# Altium PCB SimpleNode1.PcbDoc
Units mm, origin at the board's own origin, x right, y up, seen from the top; angles counter-clockwise.
Board outline 152.4 x 101.6 mm, 2 copper layers (Top Layer, Bottom Layer); 36 components, 31 nets, 118 pads, 0 vias.
Unrouted connection lines stored in the file: 73.
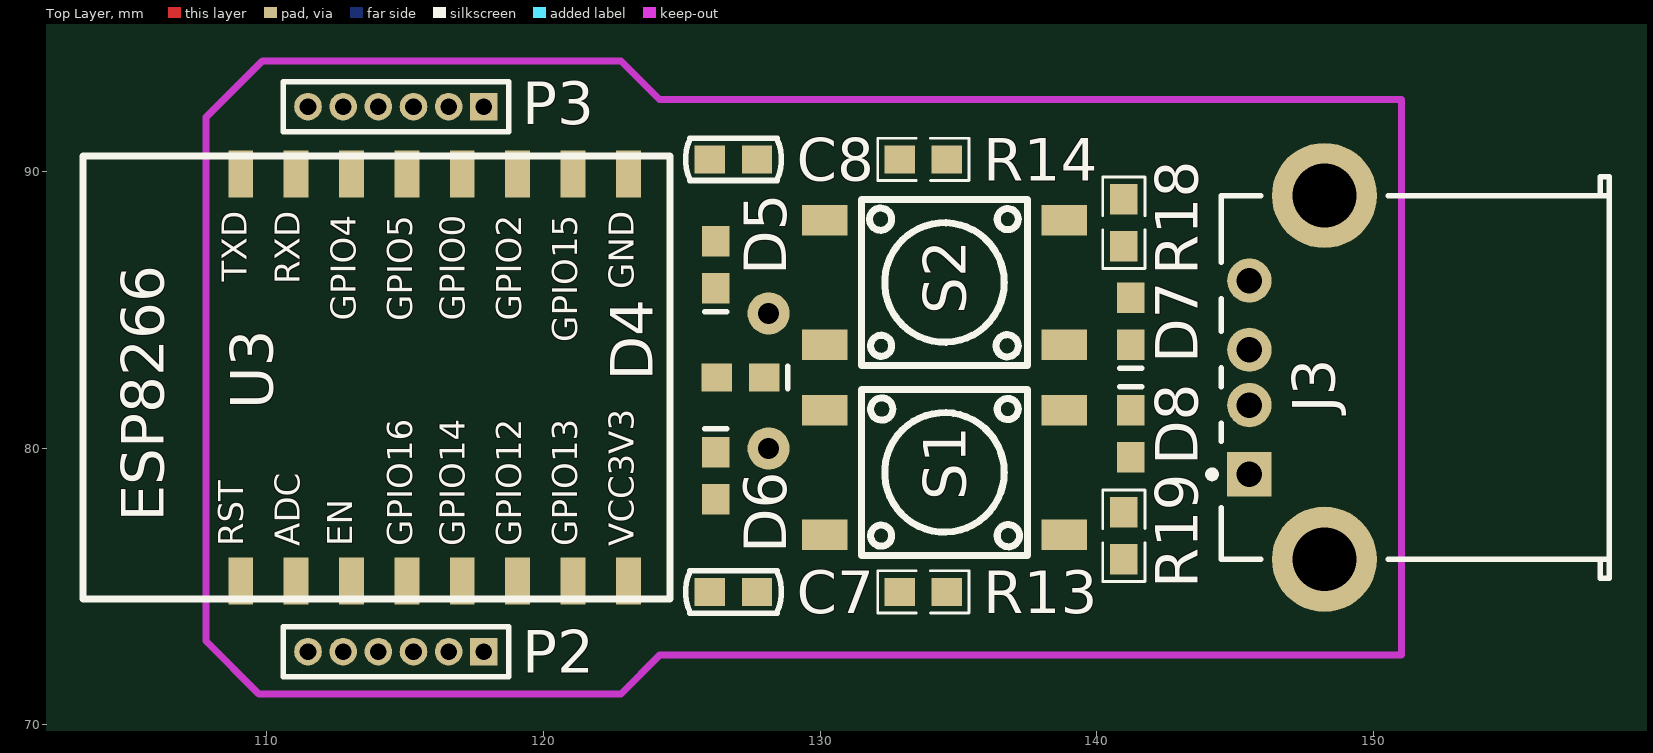
[diagram p0: Top Layer view]
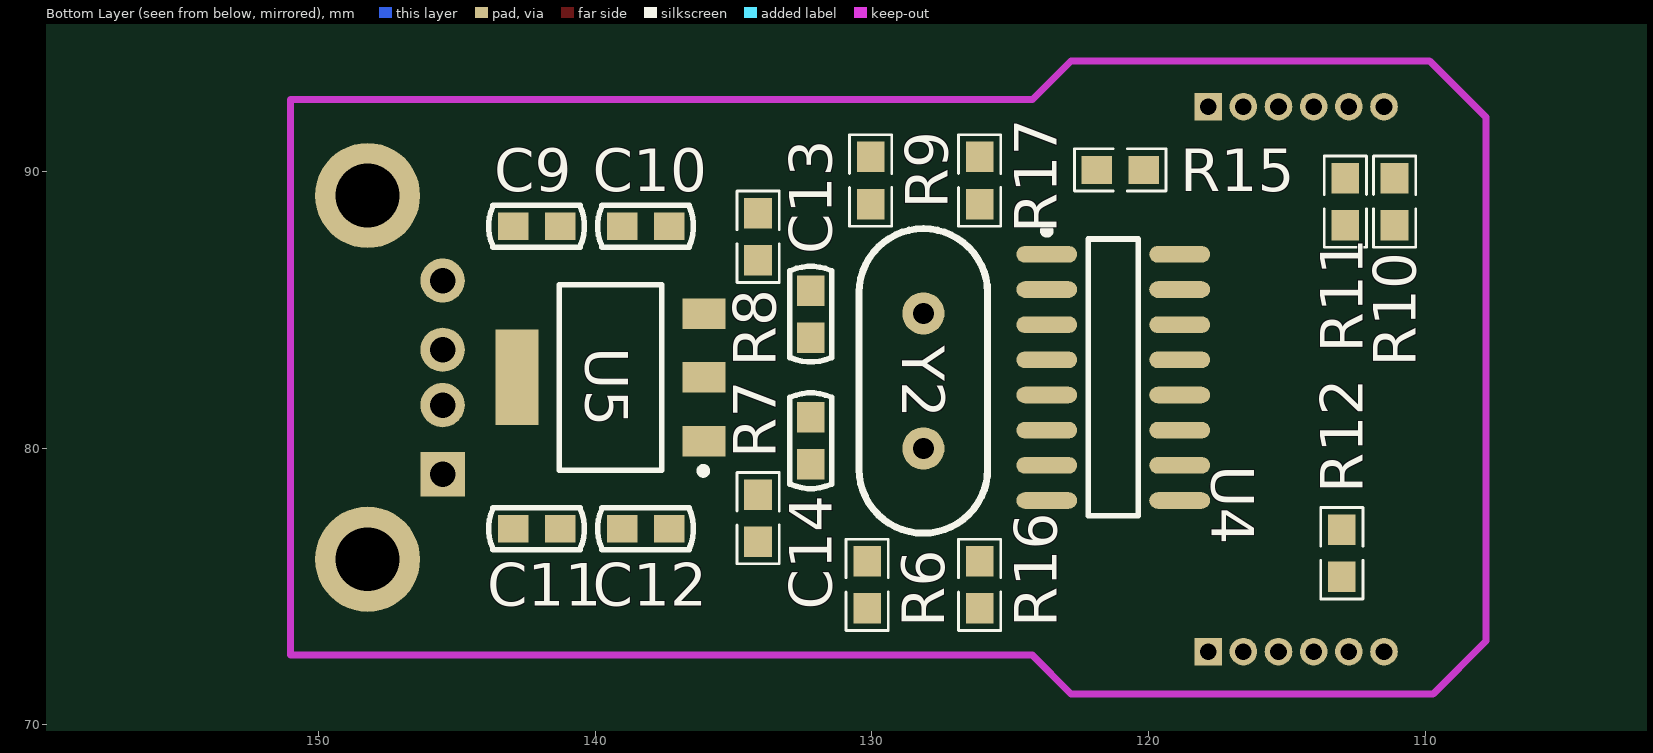
[diagram p1: Bottom Layer view, seen from below]

## Layer stack, top to bottom
Top Layer: signal copper 0.0356
Dielectric: dielectric 0.32, FR-4, Dk 4.8
Bottom Layer: signal copper 0.0356

## Board outline
25.4,25.4 177.8,25.4 177.8,127 25.4,127

## Design rules (kind name [scope] priority, off if disabled: settings)
Clearance [All] p1: gap=0.254
PolygonConnect [All] p1: connectstyle=Relief reliefconductorwidth=0.254 reliefentries=4 polygonreliefangle="90 Angle"
RoutingVias [All] p1: holewidth=0.711 width=1.27 viastyle="Through Hole" minholewidth=0.711 minwidth=1.27 maxholewidth=0.711 maxwidth=1.27
SilkscreenOverComponentPads [All] p1: minsilkscreentomaskgap=0
SolderMaskExpansion [All] p1: expansion=0.102
Width [All] p1: maxlimit=0.254 minlimit=0.254 preferedwidth=0.254
27 further rules are at their usual default settings.

## Components (designator, comment, footprint, x,y, rotation, side; value= is the part's Value field where it differs from the comment)
C7 "100uF" C-RAD-0603 126.873,74.803 r180 top
C8 "104" C-RAD-0603 126.873,90.424 r0 top
C9 "104" C-RAD-0603 142.113,88.011 r0 bottom
C10 "106" C-RAD-0603 138.176,88.011 r180 bottom
C11 "104" C-RAD-0603 142.113,77.089 r0 bottom
C12 "106" C-RAD-0603 138.176,77.089 r0 bottom
C13 "20pF" C-RAD-0603 132.207,84.836 r90 bottom
C14 "20pF" C-RAD-0603 132.207,80.264 r90 bottom
D4 "WF" CD1608-0603 127.127,82.55 r0 top
D5 "TXD" CD1608-0603 126.238,86.614 r270 top
D6 "RXD" CD1608-0603 126.238,78.994 r90 top
D7 "PW5V" CD1608-0603 141.224,84.582 r270 top
D8 "PW3V3" CD1608-0603 141.224,80.518 r90 top
J3 "USB" USB_A1 158.496,82.55 r0 top
P2 "MHDR1X6" MHDR1X6 117.856,72.644 r180 top
P3 "MHDR1X6" MHDR1X6 117.856,92.329 r180 top
R6 "470" 0603-1 130.175,75.057 r270 bottom
R7 "12K" 0603-1 134.112,77.47 r90 bottom
R8 "12K" 0603-1 134.112,87.63 r90 bottom
R9 "470" 0603-1 130.048,89.662 r90 bottom
R10 "470" 0603-1 111.125,88.9 r270 bottom
R11 "470" 0603-1 112.903,88.9 r270 bottom
R12 "0/NC" 0603-1 113.03,76.2 r270 bottom
R13 "470" 0603-1 133.731,74.803 r0 top
R14 "12K" 0603-1 133.731,90.424 r180 top
R15 "12K" 0603-1 121.031,90.043 r180 bottom
R16 "470" 0603-1 126.111,75.057 r270 bottom
R17 "470" 0603-1 126.111,89.662 r90 bottom
R18 "470" 0603-1 140.97,88.138 r90 top
R19 "470" 0603-1 140.97,76.835 r270 top
S1 "FLASH" Switch-6-6-5 134.493,79.121 r180 top
S2 "USER" Switch-6-6-5 134.493,85.979 r0 top
U3 "ESP8266-07" ESP07-16P 103.378,74.549 r90 top
U4 "CH340G" SOP-16_N 121.285,82.55 r180 bottom
U5 "ASM1117-3.3V" SOT-223 139.446,82.55 r90 bottom
Y2 "XTAL" HC-49S 128.143,82.423 r270 bottom

## Footprints (in the part's own frame and the unit in brackets; to place one, negate y for a bottom-side part, rotate by r counter-clockwise, add the part's x,y. Pads: shape width x height; smd on the part's side, far side on the other; paste and mask are expansions set on the pad)
0603-1 [mm]
  rect 1.1x1 smd: 1(-0.85,0) 2(0.85,0)
  silkscreen extent -1.65,-0.76 1.65,0.76, body extent -1.14,-0.38 1.14,0.38, height 1
C-RAD-0603 [mm]
  rect 1.1x1 smd: 1(-0.85,0) 2(0.85,0)
  silkscreen extent -1.73,-0.76 1.73,0.76, body extent -1.14,-0.38 1.14,0.38, height 1
CD1608-0603 [mm]
  rect 1.1x1 smd: 1(-0.85,0) 2(0.85,0)
  silkscreen extent 1.7,-0.4 1.7,0.4
ESP07-16P [mm] "ESP8266-07"
  rect 1.7x0.9 smd: 1(0.65,-5.7) 2(0.65,-7.7) 3(0.65,-9.7) 4(0.65,-11.7) 5(0.65,-13.7) 6(0.65,-15.7) 7(0.65,-17.7) 8(0.65,-19.7) 9(15.35,-19.7) 10(15.35,-17.7) 11(15.35,-15.7) 12(15.35,-13.7) 13(15.35,-11.7) 14(15.35,-9.7) 15(15.35,-7.7) 16(15.35,-5.7)
  silkscreen extent 0,-21.2 16,0
HC-49S [mil] "HC-49S 12M 无?"
  round 60 hole 30: 1(-96.06,0) 2(96.06,0)
  silkscreen extent -217,-92 217,92
MHDR1X6 [mm] "Connector; Header; 6 Position"
  rect 1x1 hole 0.6: 1(0,0)
  round 1 hole 0.6: 2(1.27,0) 3(2.54,0) 4(3.81,0) 5(5.08,0) 6(6.35,0)
  silkscreen extent -0.9,-0.9 7.25,0.9
SOP-16_N [mm] "SOIC, 16-Leads, Body 9.9x3.9mm, Pitch 1.27mm, IPC Medium Density"
  oval 2.2x0.6 smd: 1(-2.4,4.445) 2(-2.4,3.175) 3(-2.4,1.905) 4(-2.4,0.635) 5(-2.4,-0.635) 6(-2.4,-1.905) 7(-2.4,-3.175) 8(-2.4,-4.445) 9(2.4,-4.445) 10(2.4,-3.175) 11(2.4,-1.905) 12(2.4,-0.635) 13(2.4,0.635) 14(2.4,1.905) 15(2.4,3.175) 16(2.4,4.445)
  silkscreen extent -2.53,-5 0.9,5.42, body extent -1.95,-4.95 1.95,4.95, height 1.5
SOT-223 [mm]
  rect 1.1x1.55 smd: 1(-2.3,-3.375) 2(0,-3.375) 3(2.3,-3.375)
  rect 3.45x1.55 smd: 4(0,3.375)
  silkscreen extent -3.5,-3.48 3.35,1.85, body extent -3.3,-3.94 3.3,3.43, height 0.8
Switch-6-6-5 [mm]
  rect 1.65x1.1 smd: 1(-4.325,2.25) 2(4.325,2.25) 3(-4.325,-2.25) 4(4.325,-2.25)
  silkscreen extent -3,-3 3,3
USB_A1 [mm]
  rect 1.6x1.6 hole 0.92: 1(-12.99,-3.5)
  round 1.6 hole 0.92: 2(-12.99,-1) 3(-12.99,1) 4(-12.99,3.5)
  round 3.8 hole 2.3: 5(-10.28,6.57) 6(-10.28,-6.57)
  silkscreen extent -14.46,-7.25 0,7.25

## Part data
C7 C13 C14: library part 普通电容, "Capa"
C8 C9 C10 C11 C12: library part C0603, "Ceramic Chip Capacitor - Standard"
D4 D5 D6 D7 D8: library part ·¢¹
J3: "USB½Ó¿"
P2 P3: "Header, 6-Pin"
R6 R7 R8 R9 R10 R11 R12 R13 R14 R15 R16 R17 R18 R19: library part RE
U5: library part ASM1117, "3.3VÎÈÑ¹Ð"
Y2: "Crystal Oscillator"

## Nets (pads, with @x,y where several pads share a name; then routed paths per layer and width w, separated by ;. In a path a pad name is that pad's centre, name@x,y a point inside that pad or via, vN(x,y) a via of type N, cw(c..) or ccw(c..) an arc to the next point about the centre after c; other vN are vias at no path point)
ADC: P2.6 U3.2
GND: C7.2 C8.2 C9.1 C10.1 C11.1 C12.1 C13.2 C14.2 D7.2 D8.2 J3.4 P3.6 R15.1 S1.2 S2.1 U3.9 U4.1 U5.1
GPIO0: P3.3 R8.2 R17.2 U3.12
GPIO2: P3.2 R14.2 U3.11
GPIO4: P3.5 U3.14
GPIO5: P3.4 U3.13
GPIO12: P2.4 U3.6
GPIO13: P2.3 U3.7
GPIO14: P2.5 U3.5
GPIO15: P3.1 R15.2 U3.10
NetC8_1: C8.1 U4.4
NetC13_1: C13.1 U4.7 Y2.1
NetC14_1: C14.1 U4.8 Y2.2
NetD4_A: D4.1 R16.1
NetD4_K: D4.2 R13.1 U3.4
NetD5_A: D5.1 R9.1
NetD6_A: D6.1 R6.1
NetD7_A: D7.1 R18.1
NetD8_A: D8.1 R19.1
NetJ3_2: J3.2 U4.5
NetJ3_3: J3.3 U4.6
NetR7_1: R7.1 U3.3
NetR10_1: R10.1 U3.16
NetR11_1: R11.1 U3.15
NetR12_1: R12.1 U3.1
NetR12_2: R12.2 R13.2 S2.2
NetR17_1: R17.1 S1.1
RXD: D6.2 R10.2 U4.3
TXD: D5.2 R11.2 U4.2
VCC3V3: C7.1 C11.2 C12.2 P2.1 R6.2 R7.2 R8.1 R9.2 R14.1 R16.2 R19.2 U3.8 U5.2 U5.4
VCC5V: C9.2 C10.2 J3.1 R18.2 U4.16 U5.3
pads on no net: J3.5 J3.6 P2.2 S1.3 S1.4 S2.3 S2.4 U4.9 U4.10 U4.11 U4.12 U4.13 U4.14 U4.15

## Keep-outs
Keep-Out Layer:
  lines w0.254: 107.823,73.025 109.728,71.12 113.221,71.12 118.586,71.12 122.809,71.12 124.206,72.517 125.73,72.517 134.112,72.517 138.112,72.517 151.003,72.517 151.003,92.583 138.367,92.583 125.73,92.583 124.206,92.583 122.809,93.98 122.428,93.98 113.474,93.98 109.855,93.98 107.823,91.948 107.823,73.025

## Text inside footprints (layer, text, board x,y; h text height)
U3: Top Overlay "VCC3V3" at 123.571,76.454 h1.52 r90; Top Overlay "GND" at 123.571,85.738 h1.52 r90; Top Overlay "GPIO13" at 121.539,76.454 h1.52 r90; Top Overlay "GPIO15" at 121.539,83.824 h1.52 r90; Top Overlay "GPIO12" at 119.507,76.454 h1.52 r90; Top Overlay "GPIO14" at 117.475,76.454 h1.52 r90; Top Overlay "GPIO2" at 119.507,84.598 h1.52 r90; Top Overlay "GPIO0" at 117.475,84.592 h1.52 r90; Top Overlay "GPIO5" at 115.57,84.582 h1.52 r90; Top Overlay "GPIO16" at 115.57,76.454 h1.52 r90; Top Overlay "EN" at 113.411,76.454 h1.52 r90; Top Overlay "ADC" at 111.506,76.454 h1.52 r90; Top Overlay "GPIO4" at 113.538,84.592 h1.52 r90; Top Overlay "RXD" at 111.506,85.922 h1.52 r90; Top Overlay "RST" at 109.474,76.454 h1.52 r90; Top Overlay "TXD" at 109.601,86 h1.52 r90; Top Overlay "ESP8266" at 106.299,77.343 h1.52 r90